# Altium PCB smallCollar_AA.PcbDoc
Units mil, origin at the board's own origin, x right, y up, seen from the top; angles counter-clockwise.
Board outline 1550 x 1000 mil, 4 copper layers (Top Layer, Ground, Power, Bottom Layer), stack 58.695 mil thick; 48 components, 26 nets, 160 pads, 46 vias.
Unrouted connection lines stored in the file: 43.
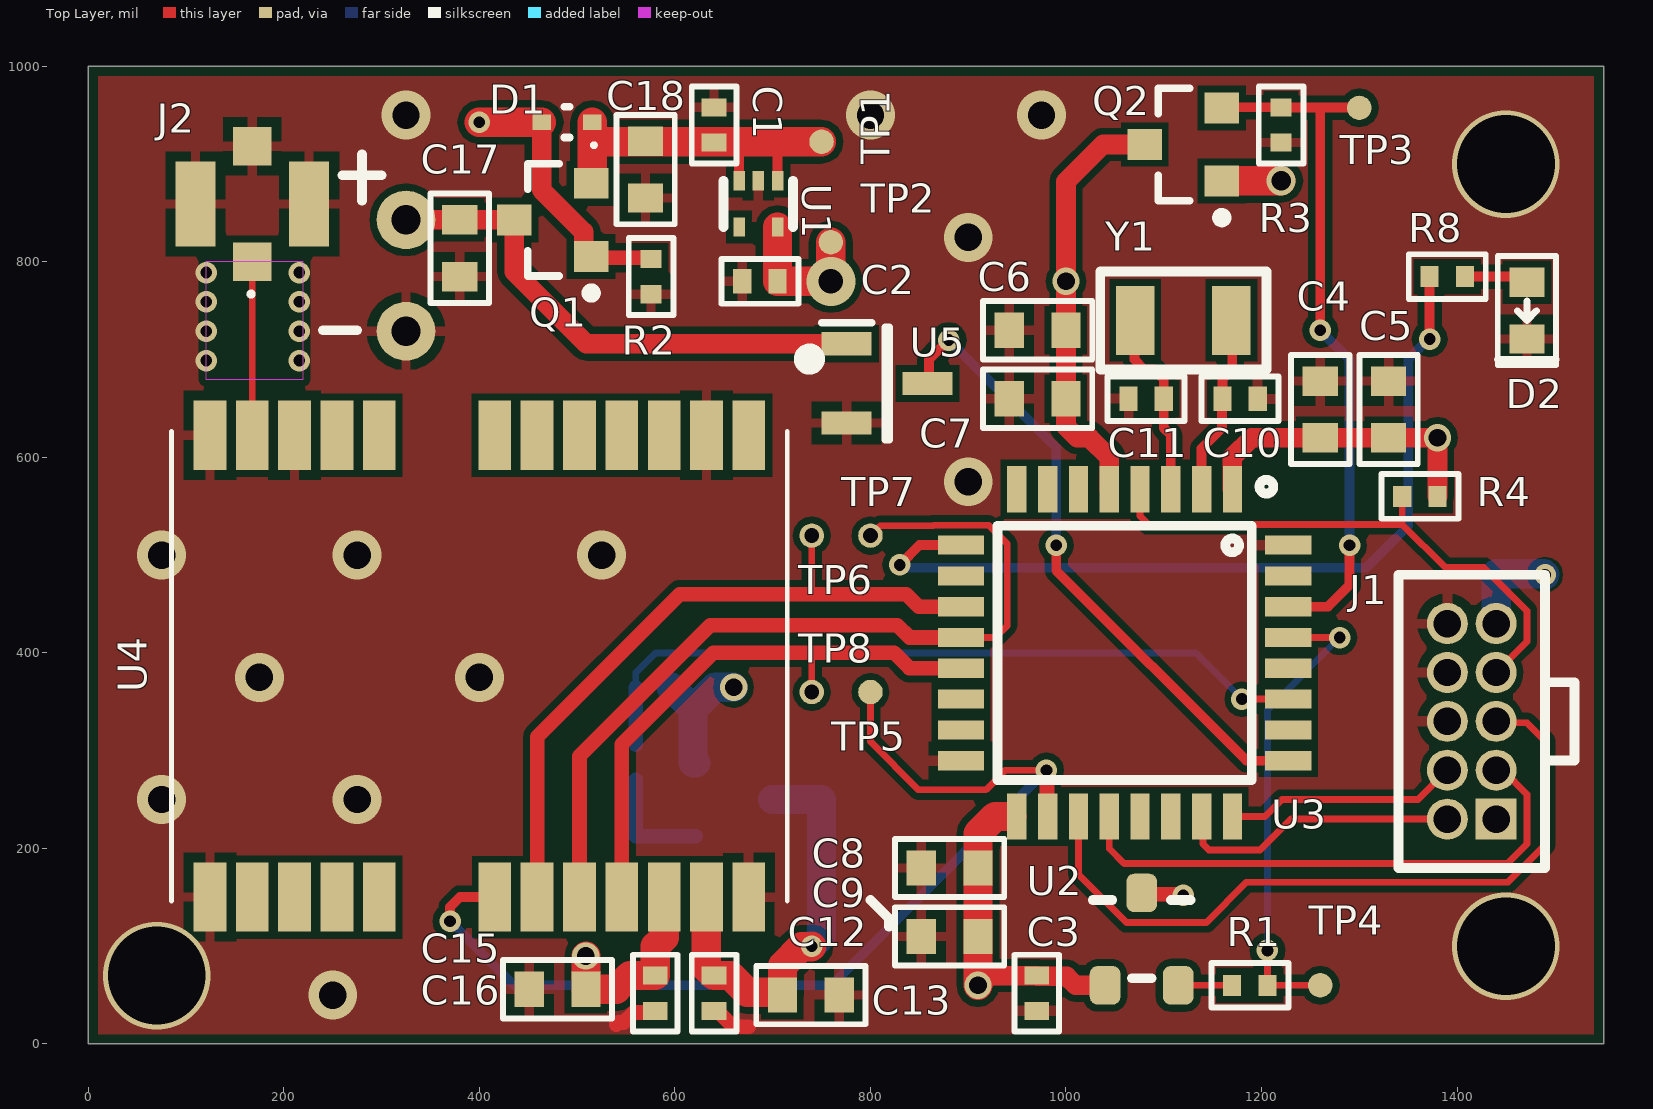
[diagram p0: Top Layer view]
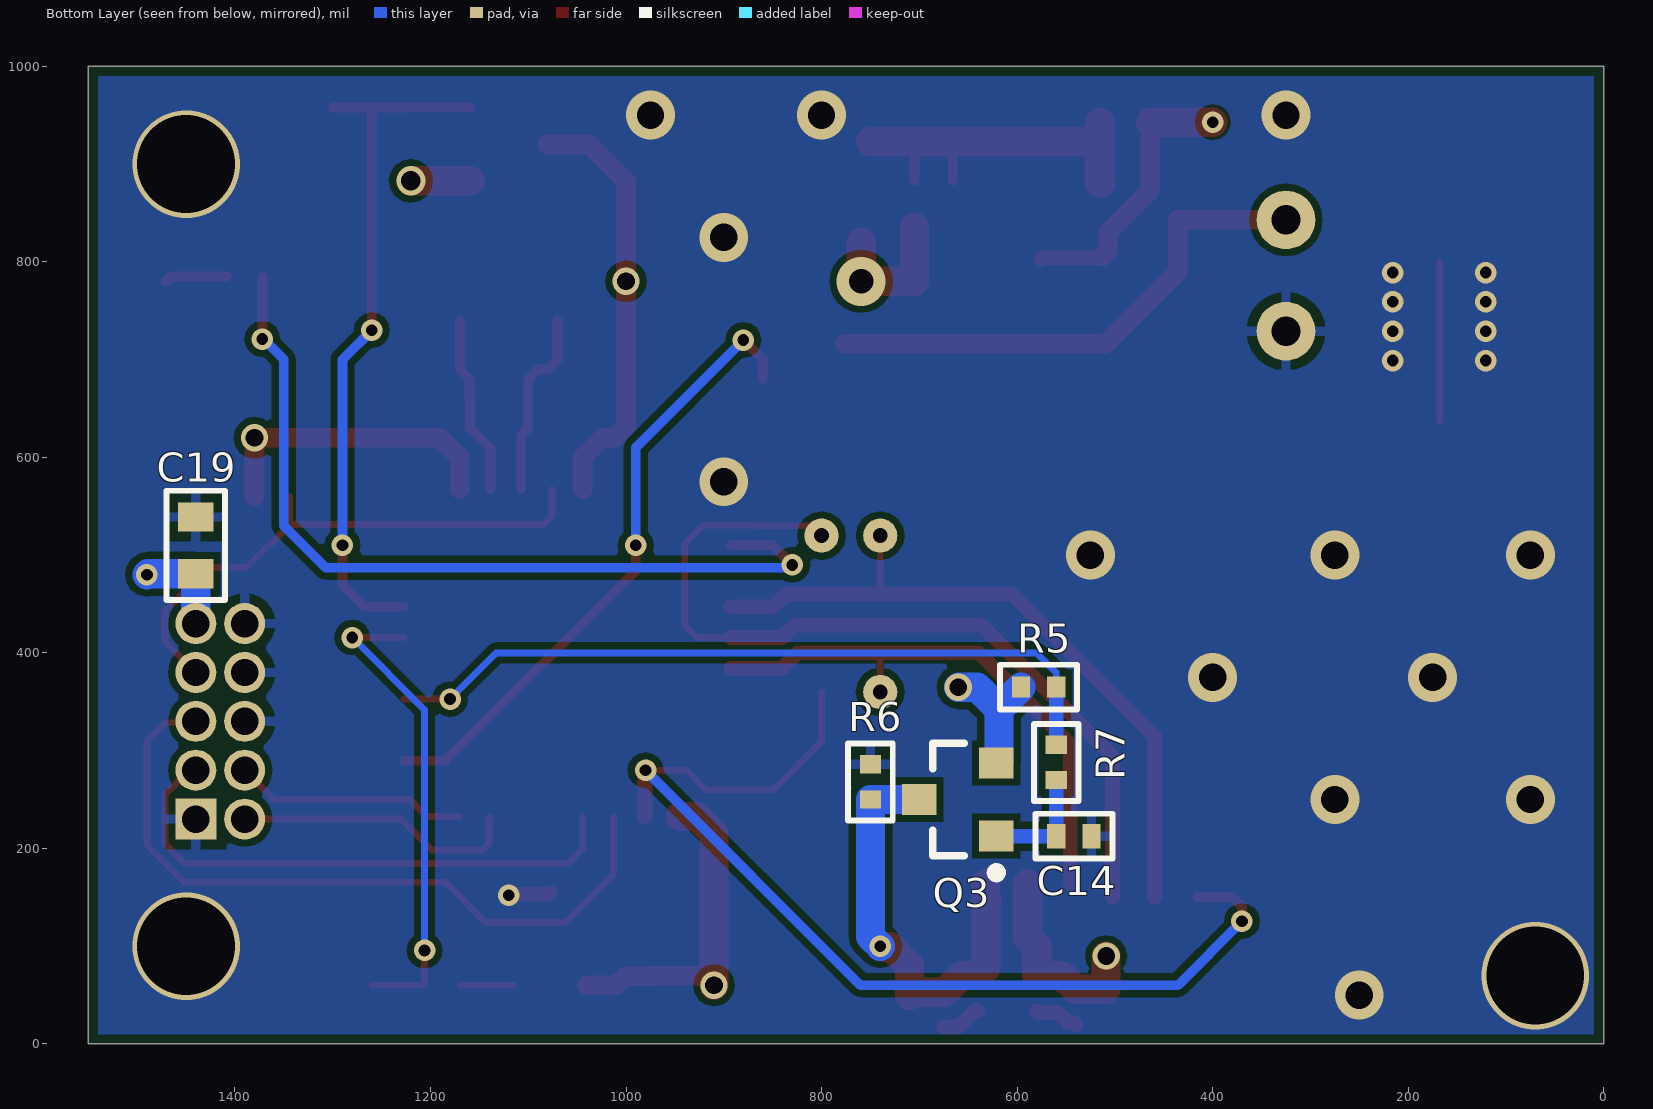
[diagram p1: Bottom Layer view, seen from below]
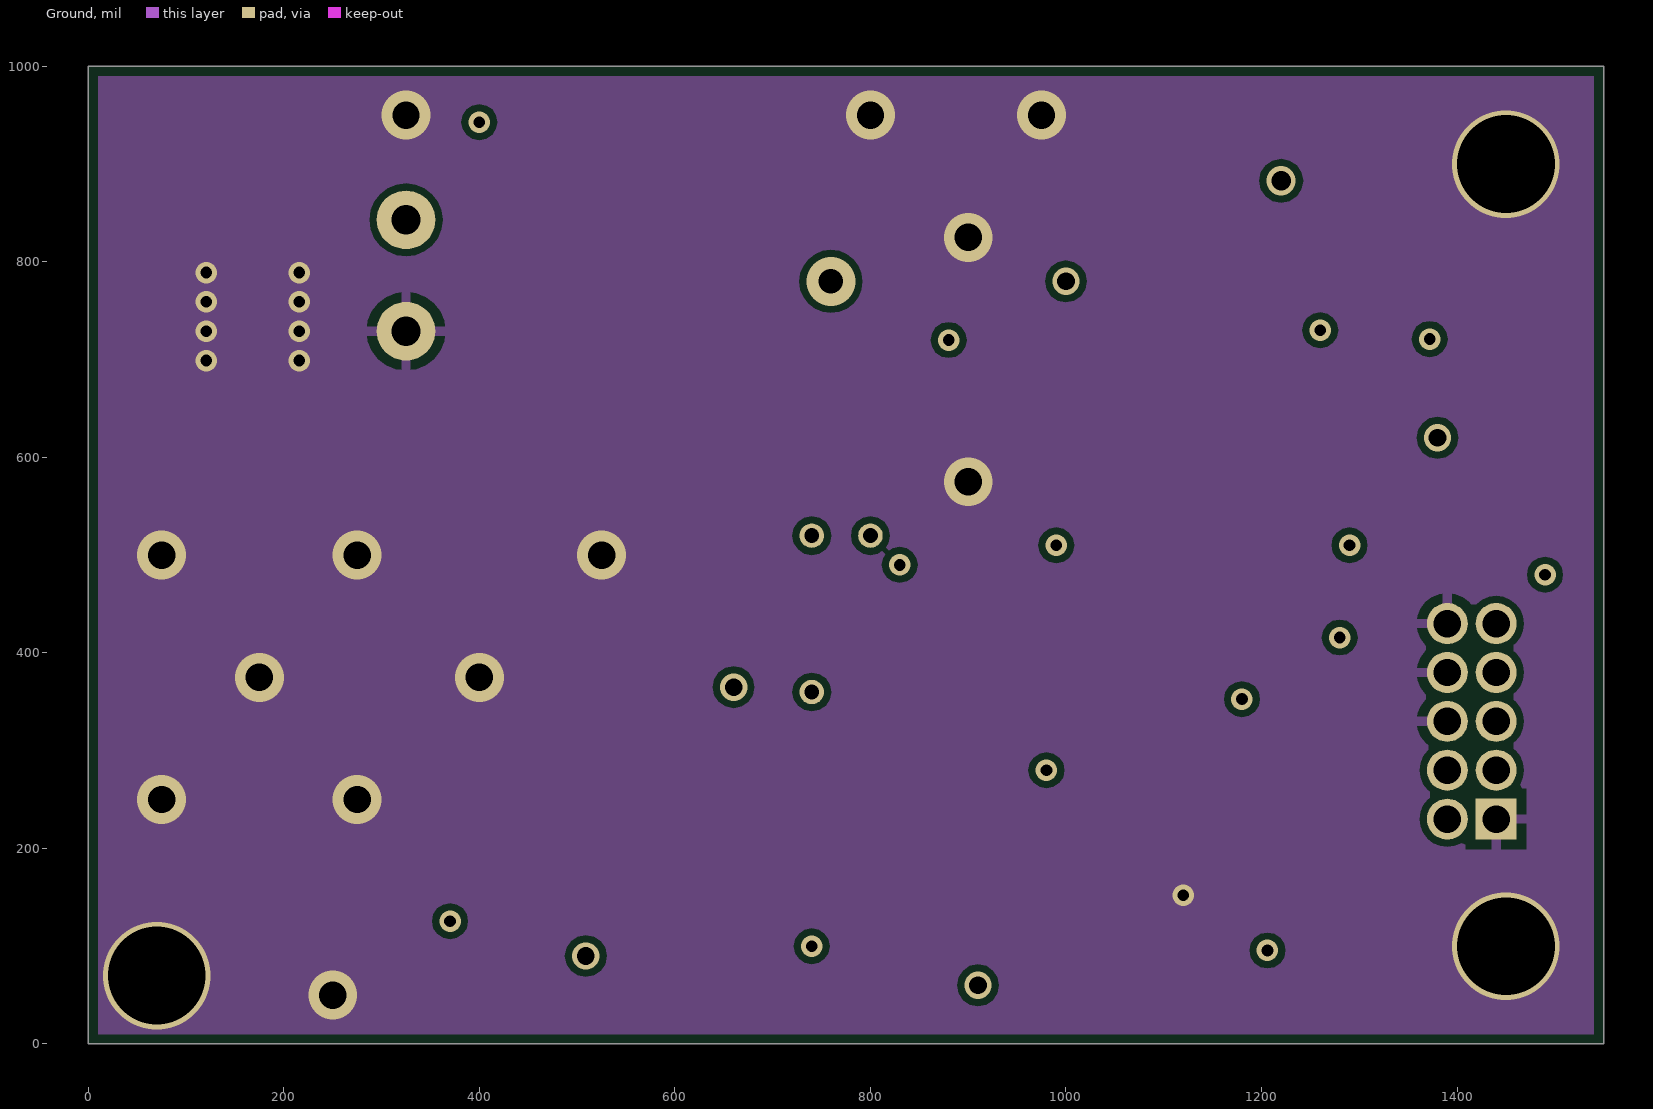
[diagram p2: Ground]
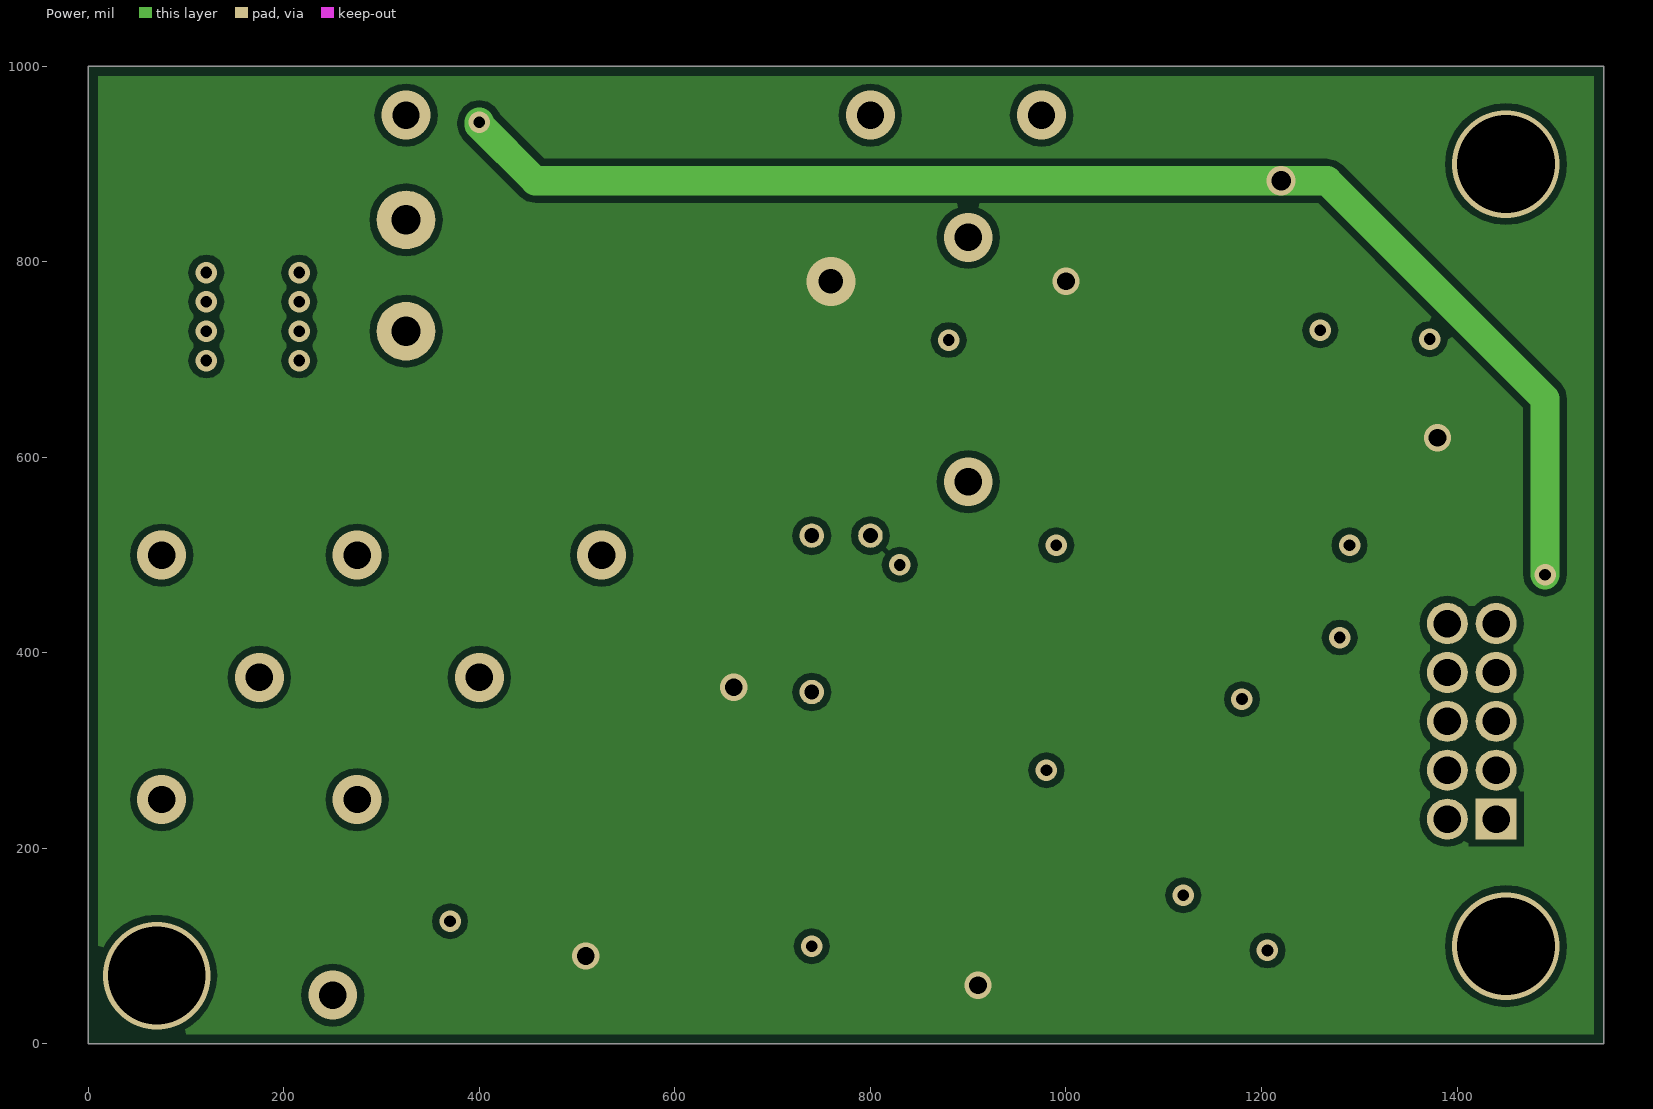
[diagram p3: Power]
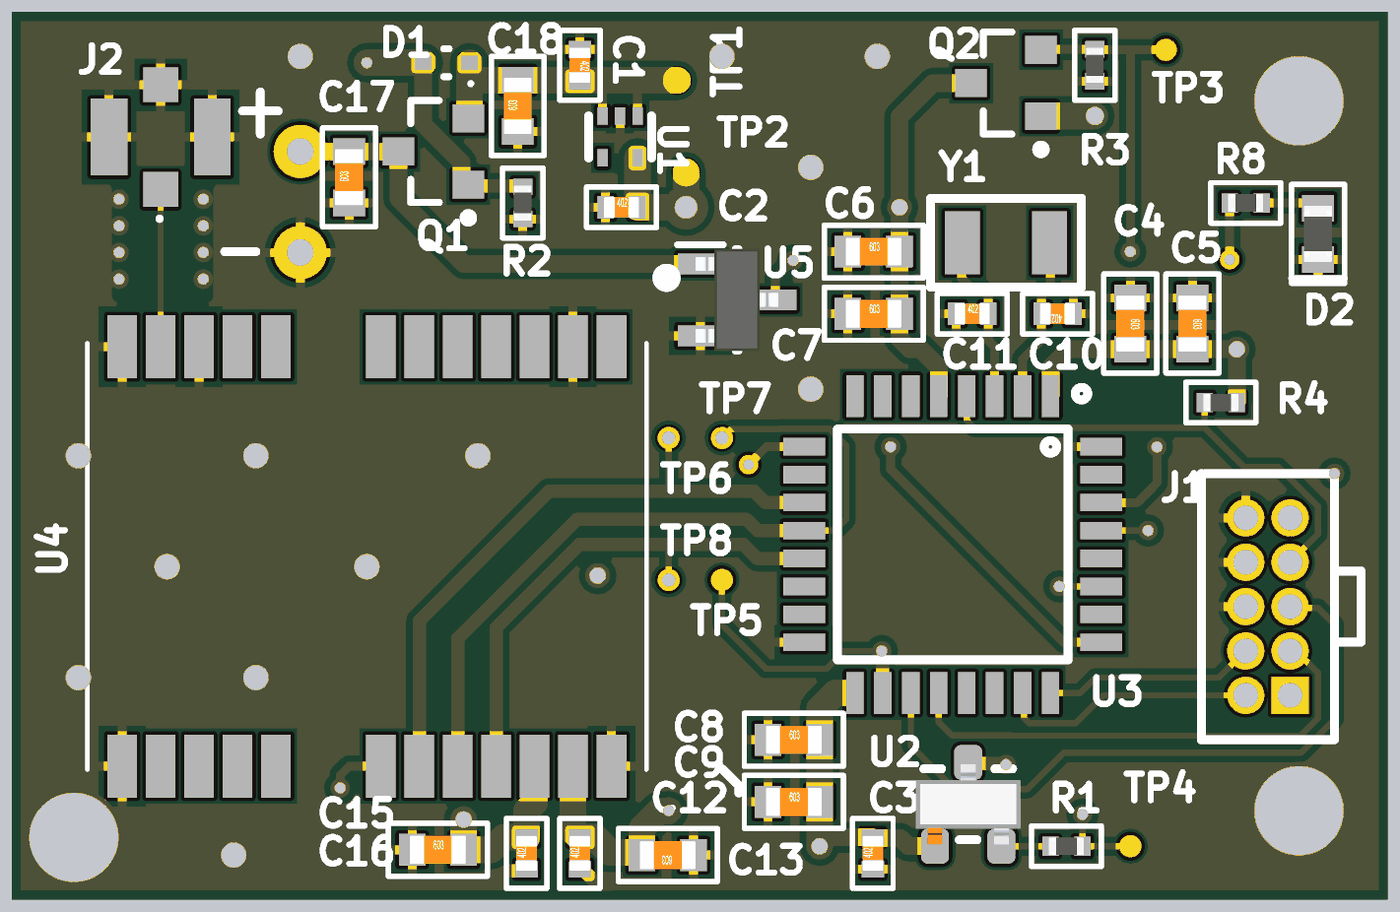
[diagram p4: 3D render of the assembled board from above, using the file's embedded part models]
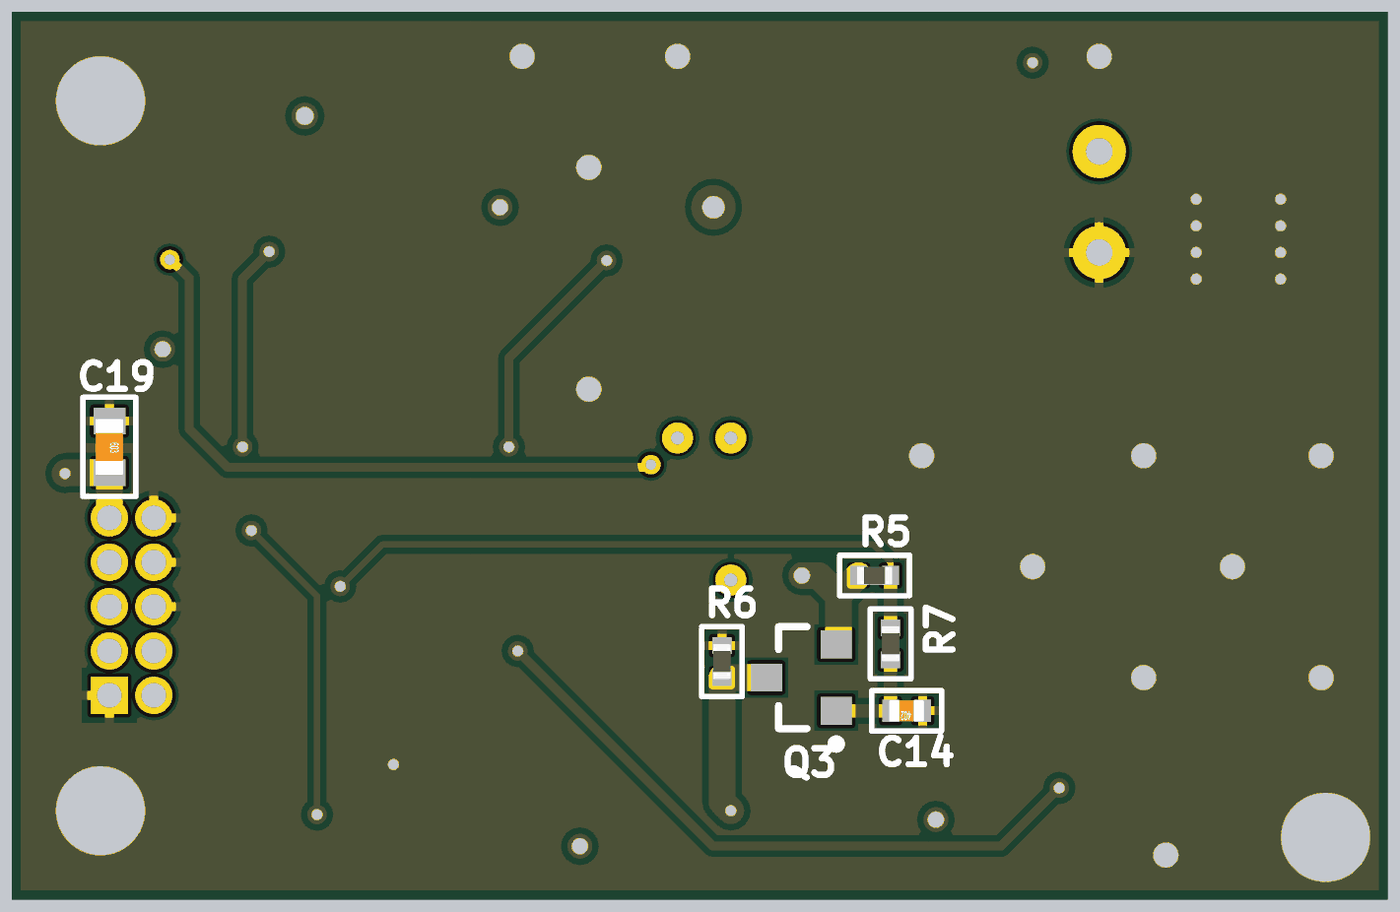
[diagram p5: 3D render of the assembled board from below, using the file's embedded part models]

## Layer stack, top to bottom
Top Solder: solder mask 0.4, Solder Resist, Dk 3.5
Top Layer: signal copper 1.4
Dielectric 2: prepreg 4.33, PP-006, Dk 4.29
Ground: signal copper 1.3778
Dielectric 1: dielectric 44.4799, FR-4, Dk 3.96
Power: signal copper 1.3778
Dielectric 3: prepreg 4.33, PP-006, Dk 4.29
Bottom Layer: signal copper 1.4
Bottom Solder: solder mask 0.4, Solder Resist, Dk 3.5

## Board outline
0,0 1550,0 1550,1000 0,1000

## Design rules (kind name [scope] priority, off if disabled: settings)
BoardOutlineClearance IsSilkScreen [OnLayer('Top Overlay') OR OnLayer('Bottom Overlay')] p1: gap=0 ignorepadtopadclearanceinfootprint=FALSE
BoardOutlineClearance [All] p2: gap=10 ignorepadtopadclearanceinfootprint=FALSE
Clearance [All] p1: gap=7 ignorepadtopadclearanceinfootprint=FALSE
ComponentClearance isLightPipe [InComponent('LP*')] p1: gap=0 collisioncheckmode=3 verticalgap=0 showdistances=FALSE
ComponentClearance isTestPoint [InComponent('TP*')] p2: gap=0 collisioncheckmode=3 verticalgap=0 showdistances=FALSE
ComponentClearance [All] p3: gap=10 collisioncheckmode=3 verticalgap=10 showdistances=FALSE
HoleSize [All] p1: absolutevalues=TRUE maxlimit=6000 minlimit=12 maxpercent=80.000 minpercent=20.000
MinimumSolderMaskSliver [All] p1: minsoldermaskwidth=0
PolygonConnect IsGround [InNet('GND')] p1: thpad.connectstyle=Relief thpad.reliefconductorwidth=10 thpad.reliefentries=4 thpad.polygonreliefangle="90 Angle" thpad.airgapwidth=10 smdpad.connectstyle=Relief smdpad.reliefconductorwidth=10 smdpad.reliefentries=4 smdpad.polygonreliefangle="90 Angle" smdpad.airgapwidth=10 via.connectstyle=Direct via.reliefconductorwidth=10 via.reliefentries=4 via.polygonreliefangle="90 Angle" via.airgapwidth=10
PolygonConnect IsntGround [All] p2: connectstyle=Direct reliefconductorwidth=10 reliefentries=4 polygonreliefangle="90 Angle" airgapwidth=10
RoutingVias [All] p1: holewidth=18 width=28 viastyle="Through Hole" minholewidth=12 minwidth=22 maxholewidth=50 maxwidth=50
SilkToSilkClearance [All] p1: silktosilkclearance=0
SilkToSolderMaskClearance [IsPad] p1: minsilkscreentomaskgap=0 clearancetoexposedcopper=TRUE
SolderMaskExpansion [All] p1: expansion=4
Width "50_OHM WIDTH" [InNetClass('50 OHM')] p1: maxlimit=7.07 minlimit=5.09 preferedwidth=7.07 toplayer_minwidth=7.07 midlayer1_maxwidth=5.09 midlayer1_prefwidth=5.09 midlayer2_maxwidth=5.09 midlayer2_prefwidth=5.09 bottomlayer_minwidth=7.07 impedanceprofiledriven=TRUE impedanceprofileid={47BAD21A-3BBF-4B96-8517-CB832543B1AE} minimp=50.000000 maximp=50.000000 favimp=50.000000
Width Power [InNetClass('Power')] p2: maxlimit=30 minlimit=10 preferedwidth=20
Width "regular trace" [All] p3: maxlimit=15 minlimit=7 preferedwidth=10
25 further rules are at their usual default settings.

## Classes and differential pairs
net class "50 OHM": NetJ2_1
net class POWER: 3V3 NetC1_2 V_BATT V_GPS VBUS
component class U_Power: C1 C2 C3 C17 C18 C19 D1 Q1 Q2 R1 R2 R3 TP1 TP2 TP3 TP4 U1 U2 U5
component class U_Microcontroller: C4 C5 C6 C7 C8 C9 C10 C11 D2 J1 R4 R8 TP5 TP6 TP7 TP8 U3 Y1
component class U_GPSModule: C12 C13 C14 C15 C16 J2 Q3 R5 R6 R7 U4

## Components (designator, comment, footprint, x,y, rotation, side; value= is the part's Value field where it differs from the comment)
C1 "C0402" 0402cap 640,940 r270 top value=0.1uF
C2 "C0402" 0402cap 686.91,780 r0 top value=1uF
C3 "C0402" 0402cap 970,51.95 r90 top value=0.11uF
C4 "C0603" 0603CAP 1260,649 r270 top value=0.1uF
C5 "C0603" 0603CAP 1330,649 r270 top value=4.7uF
C6 "C0603" 0603CAP 971,730 r0 top value=0.1uF
C7 "C0603" 0603CAP 971,660 r0 top value=4.7uF
C8 "C0603" 0603CAP 881,180 r0 top value=0.1uF
C9 "C0603" 0603CAP 881,110 r0 top value=4.7uF
C10 "C0402" 0402cap 1178.05,660 r180 top value=4.3pF
C11 "C0402" 0402cap 1081.95,660 r0 top value=4.3pF
C12 "C0402" 0402cap 640,51.95 r90 top value=0.1uF
C13 "C0603" 0603CAP 739,50 r180 top value=4.7uF
C14 "C0402" 0402cap 541.95,212.6 r0 bottom value=22nF
C15 "C0402" 0402cap 580,51.95 r90 top value=100nF
C16 "C0603" 0603CAP 480,55.98 r0 top value=4.7uF
C17 "C0603" 0603CAP 380,813.89 r90 top value=4.7uF
C18 "C0603" 0603CAP 570,894.21 r90 top value=4.7uF
C19 "C0603" 0603CAP 1440,510 r270 bottom value=4.7uF
D1 "RB521S30T1G" ONSC-SOD-523-2-502-01_V 489.61,942.89 r180 top
D2 "D0603" 0603DDE 1471.5,750 r270 top value=B
J1 "10 PIN" FTSH-105-01-F-D-K 1440,230 r90 top
J2 "73412-0110" 73412-0110 167.72,859.06 r0 top
Q1 "NTR2101PT1G" ONSC-SOT-23-3-318-08_V 474.96,842.89 r180 top
Q2 "2N7002ET1G" ONSC-SOT-23-3-318-08_V 1120,920 r180 top
Q3 "NTR2101PT1G" ONSC-SOT-23-3-318-08_V 660.63,250 r0 bottom
R1 "R0402" 0402RES 1188.05,60 r0 top value=220R
R2 "R0402" 0402RES 575.59,784.84 r90 top value=500k
R3 "R0402" 0402RES 1220,940 r90 top value=500k
R4 "R0402" 0402RES 1361.95,560 r180 top value=47k
R5 "R0402" 0402RES 578.05,365 r0 bottom value=1.0M
R6 "R0402" 0402RES 750,268.05 r270 bottom value=1.0M
R7 "R0402" 0402RES 560,288.05 r270 bottom value=220k
R8 "R0402" 0402RES 1390,784.89 r180 top value=220R
TP1 "TESTPOINT" "TP R25" 750,922.89 r180 top
TP2 "TESTPOINT" "TP R25" 759.53,820 r180 top
TP3 "TESTPOINT" "TP R25" 1300,957.4 r0 top
TP4 "TESTPOINT" "TP R25" 1260,60 r90 top
TP5 "TESTPOINT" "TP R25" 800,360 r90 top
TP6 "TESTPOINT" "TP R35 TH15" 740,520 r90 top
TP7 "TESTPOINT" "TP R35 TH15" 800,520 r90 top
TP8 "TESTPOINT" "TP R35 TH15" 740,360 r90 top
U1 "IC REG LINEAR 3.3V 200MA ESV" TCR2EE33,LM(CT 704.96,882.89 r180 top
U2 "DRV5032FBDBZT" SOT-23 1077.4,107.24 r0 top
U3 "STM32L011K4T6" LQFP32 1060,400 r180 top locked
U4 "RF RCVR GNSS/GPS 1.575GHZ 24LCC" NEO-M8N-0 400,386.54 r90 top
U5 "STM809TWX6F" SOT103P237X112-3N 817.04,675.62 r0 top
Y1 "32.768kHz" "0.126\" L x 0.061\" W (2 PAD)" 1120,740 r0 top

## Footprints (in the part's own frame and the unit in brackets; to place one, negate y for a bottom-side part, rotate by r counter-clockwise, add the part's x,y. Pads: shape width x height; smd on the part's side, far side on the other; paste and mask are expansions set on the pad)
"0.126\" L x 0.061\" W (2 PAD)" [mm] "0.126\" x 0.061\" Crystal"
  rect 1x1.8 smd: 1(-1.25,0) 2(1.25,0)
  silkscreen extent -2.16,-1.27 2.16,1.27, body extent -1.78,-0.89 1.78,0.89, height 0.8
0402cap [mm] "Chip Capacitor; Body 1.0 x 0.5 mm (LxW typ)"
  rect 0.47x0.64 smd: 1(-0.458,0) 2(0.458,0)
  silkscreen extent -1,-0.58 1,0.58, body extent -1,-0.58 1,0.58, height 0.2
0402RES [mm] "Chip Resistor; Body 1.0 x 0.5 mm (LxW typ)"
  rect 0.47x0.549 smd: 1(-0.458,0) 2(0.458,0)
  silkscreen extent -1,-0.58 1,0.58, body extent -1,-0.58 1,0.58, height 0.27
0603CAP [mil] "Chip Capacitor; Body 1.6 x 0.8 mm (LxW typ)"
  rect 30x35.98 smd: 1(-29,0) 2(29,0)
  silkscreen extent -56,-30 56,30, body extent -56,-30 56,30, height 12
0603DDE [mil] "Chip Diode; Body 1.6 x 0.8 mm (LxW typ)"
  rect 30x35.98 smd: 1(-29,0) 2(29,0)
  silkscreen extent -56,-30 56,30, body extent -56,-30 56,30, height 15
73412-0110 [mm]
  rect 1x1 smd: 1(0,-1.5) 2(0,1.5)
  rect 1.05x2.2 smd: 3(-1.475,0) 4(1.475,0)
  silkscreen extent -0.05,-2.35 -0.01,-2.32
FTSH-105-01-F-D-K [mil] "FTSH-105-01-F-D-K"
  rect 42x42 hole 28: 1(0,0)
  round 42 hole 28: 2(50,0) 3(100,0) 4(150,0) 5(200,0) 6(0,50) 7(50,50) 8(100,50) 9(150,50) 10(200,50)
  silkscreen extent -50,-50 250,100, body extent -50,-50 250,100, height 126
LQFP32 [mm] "STM LQFP32"
  rect 0.5x1.2 smd: 1(-2.8,-4.25) 2(-2,-4.25) 3(-1.2,-4.25) 4(-0.4,-4.25) 5(0.4,-4.25) 6(1.2,-4.25) 7(2,-4.25) 8(2.8,-4.25) 17(2.8,4.25) 18(2,4.25) 19(1.2,4.25) 20(0.4,4.25) 21(-0.4,4.25) 22(-1.2,4.25) 23(-2,4.25) 24(-2.8,4.25)
  rect 1.2x0.5 smd: 9(4.25,-2.8) 10(4.25,-2) 11(4.25,-1.2) 12(4.25,-0.4) 13(4.25,0.4) 14(4.25,1.2) 15(4.25,2) 16(4.25,2.8) 25(-4.25,2.8) 26(-4.25,2) 27(-4.25,1.2) 28(-4.25,0.4) 29(-4.25,-0.4) 30(-4.25,-1.2) 31(-4.25,-2) 32(-4.25,-2.8)
  silkscreen extent -3.86,-4.5 3.3,3.3, body extent -3.56,-3.56 3.56,3.56, height 1.6
NEO-M8N-0 [mm]
  rect 1.8x0.85 smd: 1(6,-7) 2(6,-5.9) 3(6,-4.8) 4(6,-3.7) 5(6,-2.6) 6(6,-1.5) 7(6,-0.4) 8(6,2.6) 9(6,3.7) 10(6,4.8) 11(6,5.9) 12(6,7) 13(-6,7) 14(-6,5.9) 15(-6,4.8) 16(-6,3.7) 17(-6,2.6) 18(-6,-0.4) 19(-6,-1.5) 20(-6,-2.6) 21(-6,-3.7) 22(-6,-4.8) 23(-6,-5.9) 24(-6,-7)
  silkscreen extent -6.1,-8.77 8.17,8, body extent -6.1,-7.62 6.1,8.13, height 0.51
ONSC-SOD-523-2-502-01_V [mm] "SOD, 2-Leads, Body 1.2x0.8mm"
  rect 0.48x0.4 smd: 1(-0.66,0) 2(0.66,0)
  silkscreen extent -0.75,-0.4 0.07,0.65, body extent -0.6,-0.4 0.6,0.4, height 0.7
ONSC-SOT-23-3-318-08_V [mm] "SOT23, 3-Leads, Body 2.92x1.3mm, Pitch 0.95mm"
  rect 0.9x0.8 smd: 1(-1,0.95) 2(-1,-0.95) 3(1,0)
  silkscreen extent -1.13,-1.46 0.65,2.02, body extent -0.65,-1.46 0.65,1.46, height 1.11
SOT103P237X112-3N [mm]
  rect 1.3x0.6 smd: 1(-1.05,1.03) 2(-1.05,-1.03) 3(1.05,0)
  silkscreen extent -1.7,-1.46 0.05,1.58, body extent -1.18,-1.46 1.18,1.46, height 1.12
SOT-23 [mm]
  rrect50% 0.8x1 smd: 1(-0.95,-1.2) 2(0.95,-1.2) 3(0,1.2)
  silkscreen extent -1.27,-1.02 1.27,1.02, body extent -1.5,-1.15 1.5,1.15, height 1.1
TCR2EE33,LM(CT [mm] "SOT-553 / TCR2EE33,LM(CT"
  rect 0.3x0.5 smd: 1(0,0) 2(0.5,0) 3(1,0) 4(1,1.2) 5(0,1.2)
  silkscreen extent -0.4,0 1.4,1.2, body extent -0.3,0 1.3,1.2, height 0.55
"TP R25" [mil] "Testpoint, Round, 25 mil Surface Pad"
  round 25 smd paste-25: 1(0,0)
  body extent -16,-16 16,16, height 0
"TP R35 TH15" [mil] "Testpoint, Round, 35 mil pad, 15 mil TH"
  round 25 / inner round 25 / far side round 35 hole 15 mask+3: 1(0,0)
  body extent -18,-17 17,17, height 0

## Part data
C1 C2 C3 C10 C11 C12 C14 C15: "0402 Ceramic Chip Capacitor - Standard"
C4 C5 C6 C7 C8 C9 C13 C16 C17 C18 C19: "0603 Ceramic Chip Capacitor - Standard"
D1: library part CMP-1051-00018-1, "Schottky Barrier Diode, 2-Pin SOD-523, Pb-Free, Tape and Reel", Manufacturer="On Semiconductor", ComponentLink1Description="Manufacturer URL", ComponentLink1URL=http://www.onsemi.com/, ComponentLink2Description=Datasheet, ComponentLink2URL=http://www.onsemi.cn/pub_link/Collateral/RB521S30T1-D.PDF, ComponentLink3Description="Package Specification", ComponentLink3URL=http://www.onsemi.com/pub_link/Collateral/502-01.PDF, Configuration=Single, DatasheetVersion="Rev. 8", IFSM Max (A)=1, Mounting Technology="Surface Mount", PackageDescription="2-Pin SOD, Body 1.2 x 0.8 mm", PackageReference=SOD-523-2-502-01, PackageVersion="Rev. E, 09/2010", Packing="Tape and Reel", PartNumber=RB521S30T1G, RoHS=TRUE
D2: "0603 SMD LED"
J1: library part FTSH-105-01-F-D-K, "10 Pin Programming Header", Manufacturer 1="Samtec Inc.", Supplier Part Number 1=SAM8909-ND, Manufacturer Part Number 1=FTSH-105-01-F-D-K, Supplier 1=Digikey
J2: "50 Ohms, MCRF, PCB Vertical Jack Receptacle, SMT, 1.25mm Mounted Height", Manufacturer_Name=Molex, Mouser Part Number=538-73412-0110, RS Part Number=1676350, Allied_Number=70357960, Allied Price/Stock=https://www.alliedelec.com/molex-incorporated-73412-0110/70357960/, Datasheet Link=http://www.molex.com/pdm_docs/sd/734120110_sd.pdf, Manufacturer_Part_Number=73412-0110, Mouser Price/Stock=https://www.mouser.com/Search/Refine.aspx?Keyword=538-73412-0110, RS Price/Stock=http://uk.rs-online.com/web/p/products/1676350
Q1: "Small Signal MOSFET, -8 V, -3.7 A, Single P-Channel, 3-Pin SOT-23, Pb-Free, Tape and Reel", Manufacturer="On Semiconductor", Package Type=SOT-23-3, Channel Polarity="P Channel", Ciss Typ (pF)=1173, ComponentLink1Description="Manufacturer URL", ComponentLink1URL=http://www.onsemi.com/, ComponentLink2Description=Datasheet, ComponentLink2URL=http://www.onsemi.cn/pub_link/Collateral/NTR2101P-D.PDF, ComponentLink3Description="Package Specification", ComponentLink3URL=http://www.onsemi.cn/pub_link/Collateral/318-08.PDF, Configuration=Single, Coss Typ (pF)=289, Crss Typ (pF)=218, DatasheetVersion="Rev. 6", ID Max (A)=3.7, Mounting Technology="Surface Mount", PackageDescription="3-Pin Small Outline Transistor, Body 2.92 x 1.3 mm, Pitch 0.95 mm", PackageReference=SOT-23-3-318-08, PackageVersion="Rev. AP, 11/2009", Packing="Tape and Reel", PartNumber=NTR2101PT1G, PD Max (W)=0.96, RoHS=Pb-Free, V(BR)DSS Min (V)=8, VGS(th) Max (V)=1, VGS Max (V)=8
Q2: "Small Signal MOSFET, 60 V, 310 mA, Single, N-Channel, 3-Pin SOT-23, Pb-Free, Tape and Reel", Manufacturer="On Semiconductor", Package Type=SOT-23-3, Supplier Part Number 1=2N7002ET1GOSTR-ND, Channel Polarity="N Channel", Ciss Typ (pF)=26.7, ComponentLink1Description="Manufacturer URL", ComponentLink1URL=http://www.onsemi.com/, ComponentLink2Description=Datasheet, ComponentLink2URL=http://www.onsemi.com/pub_link/Collateral/2N7002E-D.PDF, ComponentLink3Description="Package Specification", ComponentLink3URL=http://www.onsemi.cn/pub_link/Collateral/318-08.PDF, Configuration=Single, Coss Typ (pF)=4.6, Crss Typ (pF)=2.9, DatasheetVersion="Rev. 3", ID Max (A)=0.31, Mounting Technology="Surface Mount", PackageDescription="3-Pin Small Outline Transistor, Body 2.92 x 1.3 mm, Pitch 0.95 mm", PackageReference=SOT-23-3-318-08, PackageVersion="Rev. AP, 11/2009", Packing="Tape and Reel", PartNumber=2N7002ET1G, RoHS=Pb-Free, Supplier 1=Digi-Key, Supplier 2=Digi-Key, Supplier 3=Digi-Key, Supplier 4=Farnell, Supplier 5=Farnell, Supplier 6=Newark, Supplier 7=Newark, Supplier 8=Mouser, Supplier Part Number 2=2N7002ET1GOSCT-ND, Supplier Part Number 3=2N7002ET1GOSDKR-ND, Supplier Part Number 4=2317895, Supplier Part Number 5=2317616, Supplier Part Number 6=09R9861, Supplier Part Number 7=50M2216, Supplier Part Number 8=863-2N7002ET1G, V(BR)DSS Min (V)=60, VGS(th) Max (V)=2.5, VGS Max (V)=20
Q3: "Small Signal MOSFET, -8 V, -3.7 A, Single P-Channel, 3-Pin SOT-23, Pb-Free, Tape and Reel", Manufacturer 1="On Semiconductor", Package Type=SOT-23-3, Channel Polarity="P Channel", Ciss Typ (pF)=1173, ComponentLink1Description="Manufacturer URL", ComponentLink1URL=http://www.onsemi.com/, ComponentLink2Description=Datasheet, ComponentLink2URL=http://www.onsemi.cn/pub_link/Collateral/NTR2101P-D.PDF, ComponentLink3Description="Package Specification", ComponentLink3URL=http://www.onsemi.cn/pub_link/Collateral/318-08.PDF, Configuration=Single, Coss Typ (pF)=289, Crss Typ (pF)=218, DatasheetVersion="Rev. 6", ID Max (A)=3.7, Manufacturer Part Number 1=NTR2101PT1G, Mounting Technology="Surface Mount", PackageDescription="3-Pin Small Outline Transistor, Body 2.92 x 1.3 mm, Pitch 0.95 mm", PackageReference=SOT-23-3-318-08, PackageVersion="Rev. AP, 11/2009", Packing="Tape and Reel", PD Max (W)=0.96, RoHS=Pb-Free, V(BR)DSS Min (V)=8, VGS(th) Max (V)=1, VGS Max (V)=8
R1 R2 R3 R4 R5 R6 R7 R8: "0402 Chip Resistor - Standard"
TP1 TP2 TP3 TP4 TP5: library part TP25, "0.025\" Round Test Point", Part Name=Testpoint, Part Number=1613
TP6 TP7 TP8: library part TP35TH10, "0.035\"/0.015\" Thru Hole Test Point", Part Name=Testpoint, Part Number=1617
U1: library part TCR2EE33,LM(CT, "Linear Voltage Regulator IC Positive Fixed 1 Output  200mA ESV", Manufacturer 1="Toshiba Semiconductor and Storage", Supplier Part Number 1=TCR2EE33LM(CTCT-ND, ComponentLink1Description=Datasheet, ComponentLink1URL=https://toshiba.semicon-storage.com/info/docget.jsp?did=13794&prodName=TCR2EF45, Manufacturer Part Number 1=TCR2EE33,LM(CT, Supplier 1=Digikey
U2: "Hall Effect Sensor"
U3: "STMicro ARM M0+ Microcontroller", Manufacturer_Name=STMicroelectronics, Manufacturer_Part_Number=STM32L011x3/4, Supplier_1=Digikey
U4: library part NEO-M8N-0, "Concurrent GNSS LCC module, TCXO, Flash, SAW, LNA", Manufacturer 1="U-Blox America Inc.", Supplier Part Number 1=672-1008-1-ND, Manufacturer Part Number 1=NEO-M8N-0, Supplier 1=Digi-Key
U5: "IC MPU RESET CIRC 3.08V SOT23", Manufacturer 1=STMicroelectronics, Supplier Part Number 1=497-3339-1-ND, ComponentLink1Description=Datasheet, ComponentLink1URL=https://www.st.com/content/ccc/resource/technical/document/datasheet/cd/e2/ab/27/7d/5d/44/41/CD00003591.pdf/files/CD00003591.pdf/jcr:content/translations/en.CD00003591.pdf, Manufacturer Part Number 1=STM809TWX6F, Supplier 1=Digi-Key
Y1: library part NX3215SA-32.768K-STD-MUA-8, "NDK RTC 12.5pF Crystal SMD", Manufacturer 1=NDK, Supplier Part Number 1=644-1156-1-ND, Manufacturer Part Number 1=NX3215SA-32.768K-STD-MUA-8, Supplier 1=Digikey

## Free pads (board coordinates)
  round 60 hole 30: 2(325,842.89) 3(325,729.06)

## Via types
v1: diameter 22, hole 12, Top Layer to Bottom Layer, tented both sides, 21 vias
v2: diameter 50, hole 28, Top Layer to Bottom Layer, tented both sides, 13 vias
v3: diameter 28, hole 18, Top Layer to Bottom Layer, tented both sides, 5 vias
v4: diameter 110, hole 100, Top Layer to Bottom Layer, tented both sides, 3 vias
v5: diameter 22, hole 12, Top Layer to Bottom Layer, 2 vias
v6: diameter 50, hole 25, Top Layer to Bottom Layer, tented both sides, 1 vias
v7: diameter 30, hole 20, Top Layer to Bottom Layer, tented both sides, 1 vias

## Nets (pads, with @x,y where several pads share a name; then routed paths per layer and width w, separated by ;. In a path a pad name is that pad's centre, name@x,y a point inside that pad or via, vN(x,y) a via of type N, cw(c..) or ccw(c..) an arc to the next point about the centre after c; other vN are vias at no path point)
3V3: C2.2 C3.2 C4.2 C5.2 C6.2 C7.2 C8.2 C9.2 C15.2 C16.2 Q2.3 Q3.2 R4.1 R5.2 TP2.1 U1.5 U2.1 U3.1 U3.5 U3.17 U4.22 | length 1581.3
  Top Layer w20: v3(910,60) 912.16,60 922.16,70 C3.2 970.75,69.25 1000.75,69.25 1010,60 U2.1 ; U3.5 1044.25,600 1024.25,620 1011.72,620 1000,631.72 C7.2 C6.2 v3(1000,780) 1000,881.95 1038.05,920 Q2.3 ; U3.1 1170.24,600.24 1190,620 C4.2 C5.2 v3(1380,620) R4.1
  Top Layer w30: v3(509,90) C16.2 540,55.98 554.02,70 C15.2 580,100 588.98,108.98 U4.22@588.98,163.78 ; U1.5 C2.2 v6(759.53,780) TP2.1 ; v3(910,60) C9.2 C8.2 910,215.1 927.57,232.68 U3.17@944.61,232.68
  Bottom Layer w30: R5.2 618.54,342.56 ; Q3.2 619.29,287.4 618.54,288.15 618.54,342.56 ; v3(660,365) 640.99,365 618.54,342.56
GND: C1.1 C2.1 C3.1 C4.1 C5.1 C6.1 C7.1 C8.1 C9.1 C10.1 C11.1 C12.1 C13.1 C14.1 C15.1 C16.1 C17.1 C18.1 C19.1 D2.2 J1.1 J1.8 J1.9 J1.10 J2.2 J2.3 J2.4 pad.3 R2.1 R3.1 R6.1 U1.2 U2.3 U3.16 U3.32 U4.2 U4.10 U4.12 U4.13 U4.24 U5.2 | length 131.8
  Top Layer w15: 540,20 542.01,22.01 547.74,22.01 557.88,32.15 578.25,32.15 C15.1 ; C12.1 643.35,33.9 659.75,17.5 675.59,17.5 ; U2.3 1078.64,153.25 1118.76,153.25 v1(1120,152.01)
  other v1: 120.79,699.06 215.79,699.06 120.79,729.06 215.79,729.06 120.79,759.06 215.79,759.06 120.79,789.06 215.79,789.06
  other v2: 250,50 75,250 275,250 175,375 400,375 75,500 275,500 525,500 900,575 900,825 325,950 800,950 975,950
  other v4: 70,70 1450,100 1450,900
GPS_CS: TP5.1 U3.18 U4.18 | length 1100
  Top Layer w7: TP5.1 800,309.28 849.28,260 917.97,260 937.97,280 v1(980,280)
  Top Layer w10: v1(370,125.63) 370,140 380.31,150.31 U4.18
  Top Layer w15: v1(980,280) 980.63,279.37 980.63,233.31 U3.18
  Bottom Layer w10: v1(370,125.63) 435.63,60 760,60 v1(980,280)
MISO: TP7.1 U3.12 U4.20 | length 882.8
  Top Layer w7: TP7.1 810,530 864.13,530 864.71,530.58 920.65,530.58 940,511.23 940,428.17 927.57,415.75 U3.12
  Top Layer w15: U4.20 502.36,294.34 636.2,428.17 827.57,428.17 840,415.75 U3.12
MOSI: TP8.1 U3.13 U4.21 | length 575
  Top Layer w7: TP8.1 740,400
  Top Layer w15: U4.21@545.67,163.78 545.67,306.53 639.14,400 740,400 824.25,400 840,384.25 U3.13
NetC1_2: C1.2 C18.2 D1.1 Q1.2 TP1.1 U1.1 U1.3 | length 375.9
  Top Layer w10: U1.3 665.59,918.49 ; U1.1 704.96,917.86 710,922.89
  Top Layer w30: Q1.2 514.85,880.3 515.59,881.04 515.59,921.95 ; D1.1 515.59,921.95 ; TP1.1 710,922.89 516.54,922.89 515.59,921.95
NetC14_2: C14.2 Q3.1 R7.2 | length 118.7
  Bottom Layer w15: R7.2 C14.2 Q3.1
NetD2_1: D2.1 R8.1 | length 65.9
  Top Layer w10: R8.1 1465.61,784.89 D2.1
NetJ2_1: J2.1 U4.11 | length 163.8
  Top Layer w7.07: U4.11@167.72,636.22 J2.1
NetQ2_2: Q2.2 R3.2 TP3.1 U3.30 | length 713.8
  Top Layer w10: Q2.2 1160.02,958.05 R3.2 1220.32,957.73 1260,957.73 ; U3.30 1267.86,447.24 1290,469.39 v1(1290,510) ; v1(1260,730) 1260,957.73 ; TP3.1 1299.68,957.73 1260,957.73
  Bottom Layer w10: v1(1260,730) 1290,700 v1(1290,510)
NetR1_1: R1.1 U2.2 | length 55.2
  Top Layer w7: U2.2 R1.1
NetR1_2: R1.2 TP4.1 U3.29 | length 498.5
  Top Layer w7: v1@1210,99.53 v1(1206.1,95.63) R1.2 TP4.1 ; U3.29 v1(1280,415.75)
  Bottom Layer w7: v1(1206.1,95.63) 1206.1,341.85 v1(1280,415.75)
NetR5_1: R5.1 R7.1 U3.27 | length 769.1
  Top Layer w7: v1(1180,352.76) U3.27
  Bottom Layer w7: R5.1 560,380 580,400 1132.76,400 v1(1180,352.76)
  Bottom Layer w15: R7.1 R5.1
NetR8_2: R8.2 U3.9 | length 874.7
  Top Layer w10: v5(830,490) 850.24,510.24 U3.9 ; v5(1371.95,721) R8.2
  Bottom Layer w10: v5(830,490) 833,487 1307,487 1350,530 1350,700 1371,721 v5(1371.95,721)
NetU3_25: U3.25 U5.3 | length 647.3
  Top Layer w10: U5.3@860,680 860,700 v1(880,720) ; v1(990,510) 990,484.48 1184.71,289.76 U3.25
  Bottom Layer w10: v1(880,720) 990,610 v1(990,510)
NRST: J1.4 R4.2 U3.4 | length 564.9
  Top Layer w7: U3.4 1075.75,540 1084.25,531.5 1343.9,531.5 1388.13,487.27 1427.27,487.27 1471.5,443.05 1471.5,411.5 J1.4 ; 1343.9,534.48 R4.2
OSCIN: C10.2 U3.2 Y1.2 | length 185.6
  Top Layer w10: U3.2 1138.74,609.07 1159.67,630 1159.67,659.67 C10.2 1160,680 1170,690 Y1.2@1170,740
OSCOUT: C11.2 U3.3 Y1.1 | length 194
  Top Layer w10: Y1.1@1070,740 1070,700 1080,690 1090,690 1100,680 C11.2 1100,630 1107.24,622.76 U3.3
SCK: TP6.1 U3.11 U4.19 | length 723.1
  Top Layer w7: 740,460 TP6.1
  Top Layer w15: U4.19 459.06,314.03 605.03,460 740,460 836.52,460 849.28,447.24 U3.11
SWCLK: J1.7 U3.24 | length 239.4
  Top Layer w7: U3.24 1203.45,232.68 1220.78,250 1360,250 J1.7
SWDIO: J1.6 U3.23 | length 294.1
  Top Layer w7: U3.23 1140,231.42 1140,204.65 1146.1,198.56 1198.56,198.56 1230,230 J1.6
USART1_RX: J1.2 U3.20 | length 567.1
  Top Layer w7: U3.20 1044.25,200 1059.58,184.67 1126.11,184.67 1126.23,184.56 1451.4,184.56 1471.5,204.65 1471.5,255.35 1446.85,280 J1.2
USART1_TX: J1.3 U3.19 | length 754.5
  Top Layer w7: U3.19 1012.76,173.46 1061.92,124.3 1143.52,124.3 1184.71,165.5 1452.15,165.5 1490,203.35 1490,310 1471.5,328.5 1441.5,328.5 J1.3
V_BATT: C17.2 pad.2 Q1.3 U5.1 | length 534.2
  Top Layer w20: pad.2 C17.2 Q1.3 435.59,790 509.42,716.18 U5.1
V_GPS: C12.2 C13.2 Q3.3 R6.2 U4.23 | length 448.7
  Top Layer w30: U4.23@630.19,148.03 632.28,148.03 U4.23@632.28,163.78 ; U4.23@631.93,148.03 631.93,78.07 C12.2 656.86,70 673.87,52.99 C13.2@710,52.99 ; C13.2 C13.2@710,52.99 ; v1(740,100) 739.53,99.53 729.53,99.53 710,80 C13.2@710,52.99
  Bottom Layer w30: Q3.3 R6.2 750,110 v1(740,100)
VBUS: C19.2 D1.2 J1.5 Q1.1 Q2.1 R2.2 | length 1835.6
  Top Layer w15: Q1.1 515.63,804.19 574.3,804.19 R2.2
  Top Layer w20: D1.2 463.63,873.5 506.62,830.51 506.62,811.24 512.37,805.49 Q1.1
  Top Layer w30: v1(400,942.89) D1.2 ; Q2.1 1159.67,882.89 v7(1220,882.89)
  Power w30: v1(400,942.89) 400,940 457.11,882.89 v7(1220,882.89) 1267.11,882.89 1490,660 v1(1490,480)
  Bottom Layer w30: J1.5 C19.2@1440,480 ; C19.2 1489,481 v1(1490,480)
pads on no net: U1.4 U3.6 U3.7 U3.8 U3.10 U3.14 U3.15 U3.21 U3.22 U3.26 U3.28 U3.31 U4.1 U4.3 U4.4 U4.5 U4.6 U4.7 U4.8 U4.9 U4.14 U4.15 U4.16 U4.17

## Polygon pours and split planes (outlines as drawn)
GND on Top Layer "Top Layer-GND" (solid, remove dead copper, pour order 2): 0,0 1550,0 1550,1000 0,1000
no net on Top Layer "NONET_L01_P010" (solid, pour order 10): 120,680
no net on Top Layer "NONET_L01_P008" (solid, pour order 8): 120,680
3V3 on Power "Power-3V3" (solid, remove dead copper, pour order 0): 0,0 1900,0 1900,1000 0,1000
GND on Bottom Layer "Bottom Layer-GND" (solid, remove dead copper, pour order 4): 0,0 1550,0 1550,1000 0,1000
GND on Ground "Ground-GND" (solid, remove dead copper, pour order 6): 0,0 1550,0 1550,1000 0,1000

## Keep-outs
Top Layer:
  rectangle: 120,680 220,800

## Silkscreen, mask and mechanical layers (free items; w line width, h text height)
Top Overlay:
  lines w10: 240,730 275,730 ; 260,888.5 300,888.5 ; 280,862.52 280,910 ; 800,147.24 819.01,128.24 819.01,120 819.01,120.99 ; 1490,290 1520,290 1520,360 1520,370 1490,370
Mechanical 1:
  the board outline again, w47.24